# EAGLE board CT_schematic (EAGLE 7.6.0)

Size 100 x 80 mm. Coordinates in mm from the lower left corner, seen from the top.
Outline: 0,0 100,0 100,80 0,80 0,0
Copper layers (1*16): Top 0.035mm / dielectric 1.5mm / Bottom 0.035mm
Design rules "default": minimum track width 10mil, minimum drill 24mil, track to track 8mil, track to pad 8mil, pad to pad 8mil, via to via 8mil, smd to smd 8mil, copper to edge 40mil, drill to drill 8mil, minimum pad ring 10mil, minimum via ring 8mil, stop-mask expansion 4mil, vias tented up to drill 0mil, thermal gap 10mil

## Footprints (pad centres in the part's own frame; a part is rotated, then mirrored left to right if it is on the bottom)
C0603 = smd 0.8 x 0.8: 1 -0.762,0; 2 0.762,0
C0402 = smd 0.5 x 0.5: 1 -0.508,0; 2 0.508,0
C1210 = smd 1.2 x 2.5: 1 -1.524,0; 2 1.524,0
C0805 = smd 1.2 x 1.3: 1 -1.016,0; 2 1.016,0
2220 = smd 1.85 x 5.5: 1 -2.55,0; 2 2.55,0
R0603 = smd 0.8 x 0.8: 1 -0.762,0; 2 0.762,0
EXV-9H = smd 3.505 x 1.676: 1 -2.857,0; 2 2.857,0
L0603 = smd 0.8 x 0.8: 1 -0.762,0; 2 0.762,0
DR1040 = smd 1.6 x 3.2: 1 -4.458,0; 2 4.458,0
PJ-037B_PACKAGE = drill 3.7 square: 1 12,0 | drill 3.2 square: 2 6,0
LQFP144 = smd 0.35 x 1.35: 1 -8.75,-10.625; 2 -8.25,-10.625; 3 -7.75,-10.625; 4 -7.25,-10.625; 5 -6.75,-10.625; 6 -6.25,-10.625; 7 -5.75,-10.625; 8 -5.25,-10.625; 9 -4.75,-10.625; 10 -4.25,-10.625; 11 -3.75,-10.625; 12 -3.25,-10.625; 13 -2.75,-10.62; 14 -2.25,-10.625; 15 -1.75,-10.625; 16 -1.25,-10.625; 17 -0.75,-10.625; 18 -0.25,-10.625; 19 0.25,-10.625; 20 0.75,-10.625; 21 1.25,-10.625; 22 1.75,-10.625; 23 2.25,-10.625; 24 2.75,-10.62; 25 3.25,-10.625; 26 3.75,-10.625; 27 4.25,-10.625; 28 4.75,-10.625; 29 5.25,-10.625; 30 5.75,-10.625; 31 6.25,-10.625; 32 6.75,-10.625; 33 7.25,-10.625; 34 7.75,-10.625; 35 8.25,-10.625; 36 8.75,-10.625; 73 8.75,10.625; 74 8.25,10.625; 75 7.75,10.625; 76 7.25,10.625; 77 6.75,10.625; 78 6.25,10.625; 79 5.75,10.625; 80 5.25,10.625; 81 4.75,10.625; 82 4.25,10.625; 83 3.75,10.625; 84 3.25,10.625; 85 2.75,10.625; 86 2.25,10.625; 87 1.75,10.625; 88 1.25,10.625; 89 0.75,10.625; 90 0.25,10.625; 91 -0.25,10.625; 92 -0.75,10.625; 93 -1.25,10.625; 94 -1.75,10.625; 95 -2.25,10.625; 96 -2.75,10.625; 97 -3.25,10.625; 98 -3.75,10.625; 99 -4.25,10.625; 100 -4.75,10.625; 101 -5.25,10.625; 102 -5.75,10.625; 103 -6.25,10.625; 104 -6.75,10.625; 105 -7.25,10.625; 106 -7.75,10.625; 107 -8.25,10.625; 108 -8.75,10.625 | smd 1.35 x 0.35: 37 10.625,-8.75; 38 10.625,-8.25; 39 10.625,-7.75; 40 10.625,-7.25; 41 10.625,-6.75; 42 10.625,-6.25; 43 10.625,-5.75; 44 10.625,-5.25; 45 10.625,-4.75; 46 10.625,-4.25; 47 10.625,-3.75; 48 10.625,-3.25; 49 10.625,-2.75; 50 10.625,-2.25; 51 10.625,-1.75; 52 10.625,-1.25; 53 10.625,-0.75; 54 10.625,-0.25; 55 10.625,0.25; 56 10.625,0.75; 57 10.625,1.25; 58 10.625,1.75; 59 10.625,2.25; 60 10.625,2.75; 61 10.625,3.25; 62 10.625,3.75; 63 10.625,4.25; 64 10.625,4.75; 65 10.625,5.25; 66 10.625,5.75; 67 10.625,6.25; 68 10.625,6.75; 69 10.625,7.25; 70 10.625,7.75; 71 10.625,8.25; 72 10.625,8.75; 109 -10.625,8.75; 110 -10.625,8.25; 111 -10.625,7.75; 112 -10.625,7.25; 113 -10.625,6.75; 114 -10.625,6.25; 115 -10.625,5.75; 116 -10.625,5.25; 117 -10.625,4.75; 118 -10.625,4.25; 119 -10.625,3.75; 120 -10.625,3.25; 121 -10.625,2.75; 122 -10.625,2.25; 123 -10.625,1.75; 124 -10.625,1.25; 125 -10.625,0.75; 126 -10.625,0.25; 127 -10.625,-0.25; 128 -10.625,-0.75; 129 -10.625,-1.25; 130 -10.625,-1.75; 131 -10.625,-2.25; 132 -10.625,-2.75; 133 -10.625,-3.25; 134 -10.625,-3.75; 135 -10.625,-4.25; 136 -10.625,-4.75; 137 -10.625,-5.25; 138 -10.625,-5.75; 139 -10.625,-6.25; 140 -10.625,-6.75; 141 -10.625,-7.25; 142 -10.625,-7.75; 143 -10.625,-8.25; 144 -10.625,-8.75
SOIC-8 = smd 1.6 x 0.6: 1 -2.7,1.905 | smd 1.55 x 0.6: 2 -2.7,0.635; 3 -2.7,-0.635; 4 -2.7,-1.905; 5 2.7,-1.905; 6 2.7,-0.635; 7 2.7,0.635; 8 2.7,1.905
88E3015A2NNP1C000 = smd 0.3 x 0.55: 1 0,0; 2 0.5,0; 3 1,0; 4 1.5,0; 5 2,0; 6 2.5,0; 7 3,0; 8 3.5,0; 9 4,0; 10 4.5,0; 11 5,0; 12 5.5,0; 13 6,0; 14 6.5,0; 29 6.5,7.5; 30 6,7.5; 31 5.5,7.5; 32 5,7.5; 33 4.5,7.5; 34 4,7.5; 35 3.5,7.5; 36 3,7.5; 37 2.5,7.5; 38 2,7.5; 39 1.5,7.5; 40 1,7.5; 41 0.5,7.5; 42 0,7.5 | smd 0.55 x 0.3: 15 7,0.5; 16 7,1; 17 7,1.5; 18 7,2; 19 7,2.5; 20 7,3; 21 7,3.5; 22 7,4; 23 7,4.5; 24 7,5; 25 7,5.5; 26 7,6; 27 7,6.5; 28 7,7; 43 -0.5,7; 44 -0.5,6.5; 45 -0.5,6; 46 -0.5,5.5; 47 -0.5,5; 48 -0.5,4.5; 49 -0.5,4; 50 -0.5,3.5; 51 -0.5,3; 52 -0.5,2.5; 53 -0.5,2; 54 -0.5,1.5; 55 -0.5,1; 56 -0.5,0.5 | smd 4.4 x 4.4: 57 3.25,3.75
7498011122R = smd 0.71 x 2.29: 1 -3.545,-3.18; 2 -2.525,-3.18; 3 -1.505,-3.18; 4 -0.485,-3.18; 5 0.535,-3.18; 6 1.555,-3.18; 8 3.595,-3.18; 9 5.635,-3.18; 10 6.655,-3.18; 11 -6.605,-3.18; 12 -5.585,-3.18 | smd 1.4 x 2.54: 13 -8.51,10.2; 14 8.51,10.2 | hole 1.4: -3.5,0; 3.5,0
PC28F512P33BFD = smd 0.45 x 0.45: A1 0,0; A2 1,0; A3 2,0; A4 3,0; A5 4,0; A6 5,0; A7 6,0; A8 7,0; B1 0,-1; B2 1,-1; B3 2,-1; B4 3,-1; B5 4,-1; B6 5,-1; B7 6,-1; B8 7,-1; C1 0,-2; C2 1,-2; C3 2,-2; C4 3,-2; C5 4,-2; C6 5,-2; C7 6,-2; C8 7,-2; D1 0,-3; D2 1,-3; D3 2,-3; D4 3,-3; D5 4,-3; D6 5,-3; D7 6,-3; D8 7,-3; E1 0,-4; E2 1,-4; E3 2,-4; E4 3,-4; E5 4,-4; E6 5,-4; E7 6,-4; E8 7,-4; F1 0,-5; F2 1,-5; F3 2,-5; F4 3,-5; F5 4,-5; F6 5,-5; F7 6,-5; F8 7,-5; G1 0,-6; G2 1,-6; G3 2,-6; G4 3,-6; G5 4,-6; G6 5,-6; G7 6,-6; G8 7,-6; H1 0,-7; H2 1,-7; H3 2,-7; H4 3,-7; H5 4,-7; H6 5,-7; H7 6,-7; H8 7,-7
QFN-32 = smd 0.6 x 0.3: 1 -2.3,1.75; 2 -2.3,1.25; 3 -2.3,0.75; 4 -2.3,0.25; 5 -2.3,-0.25; 6 -2.3,-0.75; 7 -2.3,-1.25; 8 -2.3,-1.75; 17 2.3,-1.75; 18 2.3,-1.25; 19 2.3,-0.75; 20 2.3,-0.25; 21 2.3,0.25; 22 2.3,0.75; 23 2.3,1.25; 24 2.3,1.75 | smd 0.3 x 0.6: 9 -1.75,-2.3; 10 -1.25,-2.3; 11 -0.75,-2.3; 12 -0.25,-2.3; 13 0.25,-2.3; 14 0.75,-2.3; 15 1.25,-2.3; 16 1.75,-2.3; 25 1.75,2.3; 26 1.25,2.3; 27 0.75,2.3; 28 0.25,2.3; 29 -0.25,2.3; 30 -0.75,2.3; 31 -1.25,2.3; 32 -1.75,2.3 | smd 3.2 x 3.2: EXP 0,0
SJ-43515TS-SMT-TR = smd 2.2 x 3: 1 0.6,-7.4; 4 3.4,-7.4 | smd 3 x 3: 2 12.8,-7.4; 5 17,-3 | smd 2 x 3: 3 5.3,0; 6 2.5,0 | drill 1.8: P$7 4.5,-3.69; P$8 11.54,-3.69
WM-64PC = drill 0.6 pad 1: 1 -1,0.95; 2 -1,-0.95
QFN-28 = smd 0.813 x 0.305: 1 -2.451,1.5; 2 -2.451,1; 3 -2.451,0.5; 4 -2.451,0; 5 -2.451,-0.5; 6 -2.451,-1; 7 -2.451,-1.5; 15 2.451,-1.5; 16 2.451,-1; 17 2.451,-0.5; 18 2.451,0; 19 2.451,0.5; 20 2.451,1; 21 2.451,1.5 | smd 0.305 x 0.813: 8 -1.5,-2.451; 9 -1,-2.451; 10 -0.5,-2.451; 11 0,-2.451; 12 0.5,-2.451; 13 1,-2.451; 14 1.5,-2.451; 22 1.5,2.451; 23 1,2.451; 24 0.5,2.451; 25 0,2.451; 26 -0.5,2.451; 27 -1,2.451; 28 -1.5,2.451 | smd 3.607 x 3.607: 29 0,0
ABS07-32.768KHZ-7-T = smd 1.1 x 2.4: 1 -2.5,0; 2 0,0
ABLS-25.000MHZ-B2F-T = smd 5.6 x 2.8: 1 -3.81,0; 2 5.69,0
ABLS-12.288MHZ-B4-T = smd 5.6 x 2.8: 1 -3.81,0; 2 5.69,0
ASFL1 = smd 1.7 x 1.5: 1 -1.27,-1.1; 2 1.27,-1.1; 3 1.27,1.1; 4 -1.27,1.1
WSON-8 = smd 0.3 x 0.6: 1 -0.75,0; 2 0.05,0; 3 0.85,0; 4 1.65,0; 5 1.65,3.8; 6 0.85,3.8; 7 0.05,3.8; 8 -0.75,3.8 | smd 3 x 2.6: PAD 0.45,1.9
QFN-16_EP = smd 0.805 x 0.3: 1 -1.452,0.75; 2 -1.452,0.25; 3 -1.452,-0.25; 4 -1.452,-0.75; 9 1.452,-0.75; 10 1.452,-0.25; 11 1.452,0.25; 12 1.452,0.75 | smd 0.3 x 0.805: 5 -0.75,-1.452; 6 -0.25,-1.452; 7 0.25,-1.452; 8 0.75,-1.452; 13 0.75,1.452; 14 0.25,1.452; 15 -0.25,1.452; 16 -0.75,1.452 | smd 1.55 x 1.55: 17 0,0
SON-6 = smd 0.55 x 0.3: 1 -0.355,0.5 | smd 0.52 x 0.3: 2 -0.37,0; 3 -0.37,-0.5; 4 0.37,-0.5; 5 0.37,0; 6 0.37,0.5
SW_4-1437565-2 = smd 1.4 x 2.1: 1 -2.23,4.55; 2 -2.23,-4.55; 3 2.23,4.55; 4 2.23,-4.55
LGM67K-G1J2-24-Z = smd 0.8 x 1.4: A -2,0; C 0,0
NC7SZ125M5X = smd 1.3 x 0.7: 1 -1.3,0.95; 2 -1.3,0; 3 -1.3,-0.95; 4 1.3,-0.95; 5 1.3,0.95

## Placement (x,y rotation side)
C1  1e-06  [C0603]  -66.04,100.33 0 top  (outside the outline)
C2  1e-07  [C0603]  -69.85,100.33 0 top  (outside the outline)
C3  1e-07  [C0603]  -73.66,100.33 0 top  (outside the outline)
C4  1e-07  [C0603]  -77.47,100.33 0 top  (outside the outline)
C5  1e-07  [C0603]  -81.28,100.33 0 top  (outside the outline)
C6  1e-07  [C0603]  -85.09,100.33 0 top  (outside the outline)
C7  1e-07  [C0603]  -88.9,100.33 0 top  (outside the outline)
C8  1e-07  [C0603]  -92.71,100.33 0 top  (outside the outline)
C9  1e-07  [C0603]  -96.52,100.33 0 top  (outside the outline)
C10  1e-07  [C0603]  -100.33,100.33 0 top  (outside the outline)
C11  1e-07  [C0603]  -104.14,100.33 0 top  (outside the outline)
C12  1e-07  [C0603]  -15.24,105.41 0 top  (outside the outline)
C13  1e-07  [C0603]  -19.05,105.41 0 top  (outside the outline)
C14  4.7e-06  [C0603]  -54.61,100.33 0 top  (outside the outline)
C15  2.2e-06  [C0603]  -58.42,100.33 0 top  (outside the outline)
C16  2.2e-06  [C0603]  -62.23,100.33 0 top  (outside the outline)
C17  1e-08  [C0603]  -22.86,105.41 0 top  (outside the outline)
C18  1e-06  [C0603]  -26.67,105.41 0 top  (outside the outline)
C19  1e-11  [C0402]  -87.63,110.49 0 top  (outside the outline)
C20  1e-11  [C0402]  -91.44,110.49 0 top  (outside the outline)
C21  1e-08  [C0402]  -95.25,110.49 0 top  (outside the outline)
C22  2.2e-08  [C0402]  -68.58,110.49 0 top  (outside the outline)
C23  1e-07  [C0603]  -30.48,105.41 0 top  (outside the outline)
C24  1e-07  [C0603]  -34.29,105.41 0 top  (outside the outline)
C25  1e-07  [C0603]  -38.1,105.41 0 top  (outside the outline)
C26  1e-07  [C0603]  -41.91,105.41 0 top  (outside the outline)
C27  1e-07  [C0603]  -45.72,105.41 0 top  (outside the outline)
C28  1e-07  [C0603]  -49.53,105.41 0 top  (outside the outline)
C29  2.2e-11  [C0402]  -72.39,110.49 0 top  (outside the outline)
C30  2.2e-11  [C0402]  -76.2,110.49 0 top  (outside the outline)
C31  1e-07  [C0402]  -99.06,110.49 0 top  (outside the outline)
C32  1e-08  [C0402]  -102.87,110.49 0 top  (outside the outline)
C33  1e-07  [C0402]  -15.24,115.57 0 top  (outside the outline)
C34  1e-08  [C0402]  -19.05,115.57 0 top  (outside the outline)
C35  1e-07  [C0402]  -22.86,115.57 0 top  (outside the outline)
C36  1e-08  [C0402]  -26.67,115.57 0 top  (outside the outline)
C37  1e-06  [C0603]  -53.34,105.41 0 top  (outside the outline)
C38  1e-06  [C0603]  -57.15,105.41 0 top  (outside the outline)
C39  1e-06  [C0603]  -60.96,105.41 0 top  (outside the outline)
C40  1e-06  [C0603]  -64.77,105.41 0 top  (outside the outline)
C41  1e-06  [C0603]  -68.58,105.41 0 top  (outside the outline)
C42  1e-06  [C0603]  -72.39,105.41 0 top  (outside the outline)
C43  1e-06  [C0603]  -76.2,105.41 0 top  (outside the outline)
C44  1e-07  [C0402]  -30.48,115.57 0 top  (outside the outline)
C45  1e-07  [C0402]  -34.29,115.57 0 top  (outside the outline)
C46  1e-07  [C0402]  -38.1,115.57 0 top  (outside the outline)
C47  1e-07  [C0402]  -41.91,115.57 0 top  (outside the outline)
C48  1e-06  [C0603]  -80.01,105.41 0 top  (outside the outline)
C49  2.2e-05  [C1210]  -16.51,90.17 0 top  (outside the outline)
C50  2.2e-05  [C1210]  -22.86,90.17 0 top  (outside the outline)
C51  1e-09  [C0402]  -45.72,115.57 0 top  (outside the outline)
C52  1e-09  [C0402]  -49.53,115.57 0 top  (outside the outline)
C53  1e-07  [C0402]  -53.34,115.57 0 top  (outside the outline)
C54  1e-07  [C0402]  -57.15,115.57 0 top  (outside the outline)
C55  1e-07  [C0402]  -60.96,115.57 0 top  (outside the outline)
C56  1e-07  [C0402]  -64.77,115.57 0 top  (outside the outline)
C57  1e-07  [C0402]  -68.58,115.57 0 top  (outside the outline)
C58  1e-05  [C0805]  -53.34,88.9 0 top  (outside the outline)
C59  1e-05  [C0805]  -58.42,88.9 0 top  (outside the outline)
C60  1e-05  [C0805]  -63.5,88.9 0 top  (outside the outline)
C61  1e-05  [C0805]  -68.58,88.9 0 top  (outside the outline)
C62  1e-05  [C0805]  -73.66,88.9 0 top  (outside the outline)
C63  2.2e-11  [C0402]  -80.01,110.49 0 top  (outside the outline)
C64  2.2e-11  [C0402]  -83.82,110.49 0 top  (outside the outline)
C65  1e-08  [C0402]  -72.39,115.57 0 top  (outside the outline)
C66  1e-08  [C0402]  -76.2,115.57 0 top  (outside the outline)
C67  1e-08  [C0402]  -80.01,115.57 0 top  (outside the outline)
C68  1e-05  [C1210]  -29.21,90.17 0 top  (outside the outline)
C69  1e-05  [C0805]  -78.74,88.9 0 top  (outside the outline)
C70  1e-05  [C0805]  -83.82,88.9 0 top  (outside the outline)
C71  1e-06  [C0603]  -83.82,105.41 0 top  (outside the outline)
C72  1e-07  [C0402]  -83.82,115.57 0 top  (outside the outline)
C73  6.8e-05  [2220]  -88.9,62.23 0 top  (outside the outline)
C74  8e-07  [R0603]  -87.63,105.41 0 top  (outside the outline)
C75  1e-05  [C1210]  -35.56,90.17 0 top  (outside the outline)
C76  1e-07  [C0402]  -87.63,115.57 0 top  (outside the outline)
C77  0.0001  [EXV-9H]  -91.44,73.66 0 top  (outside the outline)
C78  0.0001  [EXV-9H]  -17.78,82.55 0 top  (outside the outline)
C79  1e-08  [C0402]  -91.44,115.57 0 top  (outside the outline)
C80  1e-08  [C0402]  -95.25,115.57 0 top  (outside the outline)
F1  240.0  [L0603]  -91.44,105.41 0 top  (outside the outline)
I1  5.2e-06  [DR1040]  -38.1,62.23 0 top  (outside the outline)
J1  PJ-037B  [PJ-037B_PACKAGE]  -55.88,49.53 0 top  (outside the outline)
R2  1000.0  [R0603]  -95.25,105.41 0 top  (outside the outline)
R4  4700.0  [R0603]  -99.06,105.41 0 top  (outside the outline)
R5  4700.0  [R0603]  -102.87,105.41 0 top  (outside the outline)
R6  2200.0  [R0603]  -15.24,110.49 0 top  (outside the outline)
R7  2200.0  [R0603]  -19.05,110.49 0 top  (outside the outline)
R8  10000.0  [R0603]  -30.48,95.25 0 top  (outside the outline)
R9  10000.0  [R0603]  -35.56,95.25 0 top  (outside the outline)
R10  10000.0  [R0603]  -40.64,95.25 0 top  (outside the outline)
R11  10000.0  [R0603]  -45.72,95.25 0 top  (outside the outline)
R12  10000.0  [R0603]  -50.8,95.25 0 top  (outside the outline)
R13  10000.0  [R0603]  -55.88,95.25 0 top  (outside the outline)
R14  0.1  [R0603]  -22.86,110.49 0 top  (outside the outline)
R15  0.1  [R0603]  -26.67,110.49 0 top  (outside the outline)
R16  200.0  [R0603]  -30.48,110.49 0 top  (outside the outline)
R17  200.0  [R0603]  -34.29,110.49 0 top  (outside the outline)
R18  10000.0  [R0603]  -60.96,95.25 0 top  (outside the outline)
R19  10000.0  [R0603]  -66.04,95.25 0 top  (outside the outline)
R20  10000.0  [R0603]  -71.12,95.25 0 top  (outside the outline)
R21  2000.0  [R0603]  -38.1,110.49 0 top  (outside the outline)
R22  10000.0  [R0603]  -76.2,95.25 0 top  (outside the outline)
R23  10000.0  [R0603]  -81.28,95.25 0 top  (outside the outline)
R24  10000.0  [R0603]  -86.36,95.25 0 top  (outside the outline)
R25  10000.0  [R0603]  -91.44,95.25 0 top  (outside the outline)
R26  10000.0  [R0603]  -96.52,95.25 0 top  (outside the outline)
R27  10000.0  [R0603]  -101.6,95.25 0 top  (outside the outline)
R28  1270.0  [R0603]  -41.91,110.49 0 top  (outside the outline)
R29  1270.0  [R0603]  -45.72,110.49 0 top  (outside the outline)
R30  47000.0  [R0603]  -15.24,100.33 0 top  (outside the outline)
R31  47000.0  [R0603]  -20.32,100.33 0 top  (outside the outline)
R32  47000.0  [R0603]  -25.4,100.33 0 top  (outside the outline)
R33  680.0  [R0603]  -49.53,110.49 0 top  (outside the outline)
R34  100000.0  [R0603]  -93.98,88.9 0 top  (outside the outline)
R35  200.0  [R0603]  -53.34,110.49 0 top  (outside the outline)
R36  1000.0  [R0603]  -57.15,110.49 0 top  (outside the outline)
R37  20000.0  [R0603]  -30.48,100.33 0 top  (outside the outline)
R38  62000.0  [R0603]  -35.56,100.33 0 top  (outside the outline)
R39  300000.0  [R0603]  -99.06,88.9 0 top  (outside the outline)
R40  100000.0  [R0603]  -104.14,88.9 0 top  (outside the outline)
R41  153694.38  [R0603]  -88.9,88.9 0 top  (outside the outline)
R42  100000.0  [R0603]  -15.24,95.25 0 top  (outside the outline)
R43  10000.0  [R0603]  -40.64,100.33 0 top  (outside the outline)
R44  10000.0  [R0603]  -45.72,100.33 0 top  (outside the outline)
R45  18000.0  [R0603]  -50.8,100.33 0 top  (outside the outline)
R46  470000.0  [R0603]  -20.32,95.25 0 top  (outside the outline)
R47  120000.0  [R0603]  -25.4,95.25 0 top  (outside the outline)
U1  STM32F427ZGT6  [LQFP144]  -44.45,11.43 0 top  (outside the outline)
U2  AT25512N-SH-T  [SOIC-8]  -80.01,62.23 0 top  (outside the outline)
U3  88E3015A2NNP1C000  [88E3015A2NNP1C000]  -74.93,45.72 0 top  (outside the outline)
U4  7498011122R  [7498011122R]  -22.86,7.62 0 top  (outside the outline)
U5  PC28F512P33BFD  [PC28F512P33BFD]  -91.44,53.34 0 top  (outside the outline)
U6  SGTL5000XNAA3  [QFN-32]  -64.77,62.23 0 top  (outside the outline)
U7  SJ-43515TS-SMT-TR  [SJ-43515TS-SMT-TR]  -82.55,10.16 0 top  (outside the outline)
U8  SJ-43515TS-SMT-TR  [SJ-43515TS-SMT-TR]  -39.37,38.1 0 top  (outside the outline)
U9  SJ-43515TS-SMT-TR  [SJ-43515TS-SMT-TR]  -67.31,38.1 0 top  (outside the outline)
U10  WM-64PCT  [WM-64PC]  -50.8,62.23 0 top  (outside the outline)
U11  WM8731CLSEFL  [QFN-28]  -101.6,82.55 0 top  (outside the outline)
U12  SJ-43515TS-SMT-TR  [SJ-43515TS-SMT-TR]  -95.25,38.1 0 top  (outside the outline)
U13  SJ-43515TS-SMT-TR  [SJ-43515TS-SMT-TR]  -39.37,52.07 0 top  (outside the outline)
U14  ABS07-32.768KHZ-7-T  [ABS07-32.768KHZ-7-T]  -80.01,82.55 0 top  (outside the outline)
U15  ABLS-25.000MHZ-B2F-T  [ABLS-25.000MHZ-B2F-T]  -36.83,82.55 0 top  (outside the outline)
U16  ABLS-12.288MHZ-B4-T  [ABLS-12.288MHZ-B4-T]  -57.15,82.55 0 top  (outside the outline)
U17  ASFL-24.57MHZ-NCS  [ASFL1]  -66.04,73.66 0 top  (outside the outline)
U18  ASFL1-25MHZ-NCS  [ASFL1]  -82.55,73.66 0 top  (outside the outline)
U19  LP3878SDX-ADJ/NOPB  [WSON-8]  -30.48,72.39 0 top  (outside the outline)
U20  LTC3601EUD#PBF  [QFN-16_EP]  -62.23,110.49 0 top  (outside the outline)
U21  LP2951ACSDX/NOPB  [WSON-8]  -48.26,72.39 0 top  (outside the outline)
U22  TPS3895ADRYR  [SON-6]  -97.79,114.3 0 top  (outside the outline)
U23  4-1437565-2  [SW_4-1437565-2]  -27.94,63.5 0 top  (outside the outline)
U24  Q65110A2395  [LGM67K-G1J2-24-Z]  -88.9,82.55 0 top  (outside the outline)
U25  nc7sz125m5x  [NC7SZ125M5X]  -40.64,88.9 0 top  (outside the outline)
U26  nc7sz125m5x  [NC7SZ125M5X]  -46.99,88.9 0 top  (outside the outline)

## Library data of the parts
C1-C80 F1 I1 J1 R2 R4-R47 U1-U26 = circuit_tree

## Nets
CLK_CRYSTAL_U1_8: C19.1 U1.8 U14.1
CLK_CRYSTAL_U1_9: C20.1 U1.9 U14.2
CLK_CRYSTAL_U3_32: C29.1 U3.32 U15.1
CLK_CRYSTAL_U3_33: C30.1 U3.33 U15.2
CLK_CRYSTAL_U11_1: C63.1 U11.1 U16.1
CLK_CRYSTAL_U11_2: C64.1 U11.2 U16.2
CLK_U1_23: U1.23 U18.3
CLK_U6_21: U6.21 U17.3
GND: C1.2 C2.2 C3.2 C4.2 C5.2 C6.2 C7.2 C8.2 C9.2 C10.2 C11.2 C12.2 C13.2 C14.2 C15.2 C16.2 C17.2 C18.2 C19.2 C20.2 C21.2 C22.2 C23.2 C24.2 C25.2 C26.2 C27.2 C28.2 C29.2 C30.2 C31.2 C32.2 C33.2 C34.2 C35.2 C36.2 C44.2 C45.2 C46.2 C47.2 C48.2 C52.2 C53.2 C54.2 C55.2 C56.2 C57.2 C58.2 C59.2 C60.2 C61.2 C62.2 C63.2 C64.2 C65.2 C66.2 C67.2 C68.2 C69.2 C70.2 C71.2 C73.1 C73.2 C74.2 C75.2 C76.2 C77.2 C78.2 C79.2 C80.2 J1.2 R2.2 R14.2 R15.2 R21.2 R29.2 R30.2 R31.2 R32.2 R36.2 R37.2 R39.2 R42.2 R45.2 R47.2 U1.16 U1.31 U1.38 U1.51 U1.61 U1.83 U1.94 U1.107 U1.120 U1.130 U2.4 U3.1 U3.2 U3.57 U4.10 U4.12 U5.B2 U5.H2 U5.H4 U5.H6 U6.1 U6.3 U6.7 U6.EXP U8.1 U9.1 U10.2 U11.4 U11.15 U11.19 U11.25 U11.26 U11.29 U12.1 U13.1 U17.2 U18.2 U19.3 U19.PAD U20.1 U20.9 U20.17 U21.3 U21.4 U21.PAD U22.2 U24.C U25.1 U25.3 U26.1 U26.3
NET_U1_25: R5.1 U1.25 U26.4
NET_U1_27: R6.1 U1.27 U3.38
NET_U1_33: C17.1 C18.1 F1.1 U1.32 U1.33
NET_U1_36: R7.1 U1.36 U3.35
NET_U1_48: R10.1 U1.48
NET_U1_71: C15.1 U1.71
NET_U1_106: C16.1 U1.106
NET_U1_138: R9.1 U1.138
NET_U1_141: U24.A
NET_U1_142: U23.3 U23.4
NET_U1_143: R8.1 U1.143
NET_U2_3: R11.1 U2.3
NET_U2_7: R13.1 U2.7
NET_U3_9: R19.1 U3.9
NET_U3_10: R22.1 U3.10
NET_U3_16: R18.1 U3.16
NET_U3_19: U3.19
NET_U3_28: R21.1 U3.28
NET_U3_39: R20.1 U3.39
NET_U3_44: U3.44 U3.48 U3.49 U3.56
NET_U4_1: U3.26 U4.1
NET_U4_3: U3.25 U4.3
NET_U4_4: U3.23 U4.4
NET_U4_5: C22.1 U4.2 U4.5
NET_U4_6: U3.22 U4.6
NET_U4_7: R16.2
NET_U4_8: R15.1 R17.2 U4.8
NET_U4_9: R16.1 U4.9
NET_U4_11: R17.1 U4.11
NET_U4_13: R14.1 U4.13 U4.14
NET_U5_A4: C35.1 C36.1 U5.A4
NET_U5_C6: R26.1 U5.C6
NET_U5_D4: R4.1 U5.D4 U25.4
NET_U6_10: C47.1 U6.10
NET_U6_29: R28.1 U6.29
NET_U6_31: R29.1 U6.31
NET_U7_1: U6.4 U7.1
NET_U7_2: U6.2 U7.2
NET_U7_5: U6.6 U7.5
NET_U8_2: C38.1 U8.2
NET_U8_5: C37.1 U8.5
NET_U8_11: C38.2
NET_U8_12: C37.2
NET_U9_2: C40.1 C41.1 U9.2
NET_U9_5: C39.1 U9.5
NET_U9_13: C40.2 C41.2
NET_U9_14: C39.2
NET_U10_1: C42.1 C43.1 C48.1 U6.16 U10.1
NET_U10_15: C42.2 C43.2
NET_U11_9: U11.9
NET_U11_20: C57.1 C62.1 U11.20
NET_U12_2: C50.1 R31.1 U12.2
NET_U12_5: C49.1 R30.1 U12.5
NET_U12_13: C49.2
NET_U12_14: C50.2
NET_U13_5: C51.1 C52.1 R32.1 R33.1 U13.5
NET_U13_21: R33.2
NET_U13_22: C51.2
NET_U19_1: C67.1 U19.1
NET_U19_6: R35.2 R36.1 U19.6
NET_U19_8: R34.1 U19.8
NET_U20_3: C72.2 I1.1 U20.3 U20.4
NET_U20_6: C72.1 U20.6
NET_U20_7: C71.1 U20.7 U20.12
NET_U20_10: R39.1 U20.10
NET_U20_11: R37.1 R38.1 U20.11
NET_U20_14: U20.14
NET_U20_ATNET_3: I1.2 R38.2
NET_U21_5: R40.1 U21.5
NET_U21_7: R41.2 R42.1 U21.7
NET_U22_1: R44.1 R45.1 U22.1
NET_U22_3: R46.2 R47.1 U22.3
NET_U22_4: R43.1 U22.4 U25.2 U26.2
NET_U23_1: R2.1 U23.1 U23.2
PROC_ETH_COL: U1.37 U3.3 U3.19
PROC_ETH_CRS: U1.34 U3.18
PROC_ETH_RX_CLK: U1.35 U3.45
PROC_ETH_RX_DV: U1.43 U3.41
PROC_ETH_RX_ER: U1.69 U3.17
PROC_ETH_RXD0: U1.44 U3.42
PROC_ETH_RXD1: U1.45 U3.43
PROC_ETH_RXD2: U1.46 U3.46
PROC_ETH_RXD3: U1.47 U3.47
PROC_ETH_TX_CLK: U1.29 U3.52
PROC_ETH_TX_EN: U1.70 U3.55
PROC_ETH_TXD0: U1.73 U3.50
PROC_ETH_TXD1: U1.129 U3.51
PROC_ETH_TXD2: U1.28 U3.53
PROC_ETH_TXD3: U1.139 U3.54
PROC_FMC_A0: U1.10 U5.A1
PROC_FMC_A1: U1.11 U5.B1
PROC_FMC_A2: U1.12 U5.C1
PROC_FMC_A3: U1.13 U5.D1
PROC_FMC_A4: U1.14 U5.D2
PROC_FMC_A5: U1.15 U5.A2
PROC_FMC_A6: U1.50 U5.C2
PROC_FMC_A7: U1.53 U5.A3
PROC_FMC_A8: U1.54 U5.B3
PROC_FMC_A9: U1.55 U5.C3
PROC_FMC_A10: U1.56 U5.D3
PROC_FMC_A11: U1.57 U5.C4
PROC_FMC_A12: U1.87 U5.A5
PROC_FMC_A13: U1.88 U5.B5
PROC_FMC_A14: U1.89 U5.C5
PROC_FMC_A15: U1.90 U5.D7
PROC_FMC_A16: U1.80 U5.D8
PROC_FMC_A17: U1.81 U5.A7
PROC_FMC_A18: U1.82 U5.B7
PROC_FMC_A19: U1.2 U5.C7
PROC_FMC_A20: U1.3 U5.C8
PROC_FMC_A21: U1.4 U5.A8
PROC_FMC_A22: U1.5 U5.G1
PROC_FMC_A23: U1.1 U5.H8
PROC_FMC_A24: U1.128 U5.B6
PROC_FMC_CLK: U1.117 U5.E6
PROC_FMC_D0: U1.85 U5.F2
PROC_FMC_D1: U1.86 U5.E2
PROC_FMC_D2: U1.114 U5.G3
PROC_FMC_D3: U1.115 U5.E4
PROC_FMC_D4: U1.58 U5.E5
PROC_FMC_D5: U1.59 U5.G5
PROC_FMC_D6: U1.60 U5.G6
PROC_FMC_D7: U1.63 U5.H7
PROC_FMC_D8: U1.64 U5.E1
PROC_FMC_D9: U1.65 U5.E3
PROC_FMC_D10: U1.66 U5.F3
PROC_FMC_D11: U1.67 U5.F4
PROC_FMC_D12: U1.68 U5.F5
PROC_FMC_D13: U1.77 U5.H5
PROC_FMC_D14: U1.78 U5.G7
PROC_FMC_D15: U1.79 U5.E7
PROC_FMC_NE2: R24.1 U1.124 U5.B4
PROC_FMC_NL: R23.1 U1.137 U5.F6
PROC_FMC_NOE: R25.1 U1.118 U5.F8
PROC_FMC_NWAIT: U1.122 U5.F7
PROC_FMC_NWE: R27.1 U1.119 U5.G8
PROC_I2S2_CK: U1.74 U11.7
PROC_I2S2_EXT_SD: U1.75 U11.10
PROC_I2S2_SD: U1.76 U11.8
PROC_I2S2_WS: U1.140 U11.9 U11.11
PROC_I2S3_CK: U1.111 U6.24
PROC_I2S3_EXT_SD: U1.112 U6.25
PROC_I2S3_SD: U1.113 U6.26
PROC_I2S3_WS: U1.110 U6.23
PROC_SPI1_MISO: U1.42 U2.2
PROC_SPI1_MOSI: U1.135 U2.5
PROC_SPI1_NSS: R12.1 U1.40 U2.1
PROC_SPI1_SCK: U1.41 U2.6
VCC_S1_12V9: C68.1 C70.1 C74.1 C77.1 C78.1 J1.1 R34.2 U19.4 U20.15 U20.16 U21.8
VCC_TIER1_1V2: C23.1 C24.1 C44.1 C69.1 R35.1 U3.4 U3.11 U3.34 U6.30 U19.5
VCC_TIER1_2V5: C1.1 C2.1 C3.1 C4.1 C5.1 C6.1 C7.1 C8.1 C9.1 C10.1 C11.1 C12.1 C13.1 C14.1 C21.1 C25.1 C26.1 C27.1 C28.1 C31.1 C32.1 C33.1 C34.1 C45.1 C46.1 C53.1 C54.1 C55.1 C56.1 C58.1 C59.1 C60.1 C61.1 C73.2 C76.1 C79.1 C80.1 F1.2 I1.2 R4.2 R5.2 R6.2 R7.2 R8.2 R9.2 R10.2 R11.2 R12.2 R13.2 R18.2 R19.2 R20.2 R22.2 R23.2 R24.2 R25.2 R26.2 R27.2 R28.2 R38.2 R43.2 R44.2 R46.1 U1.6 U1.17 U1.30 U1.39 U1.52 U1.62 U1.72 U1.84 U1.95 U1.108 U1.121 U1.131 U1.144 U2.8 U3.6 U3.12 U3.13 U3.20 U3.24 U3.29 U3.36 U4.2 U5.A6 U5.D5 U5.D6 U5.G4 U5.H3 U6.5 U6.20 U11.3 U11.5 U11.12 U11.18 U20.8 U22.6 U25.5 U26.5
VCC_TIER1_3V3: C65.1 C66.1 C75.1 R40.2 R41.1 U17.4 U18.4 U21.1

## Tracks (layer width: path | path; a pad name or v marks a point on that pad's centre or on a via)
CLK_CRYSTAL_U1_8  (2 unrouted)
CLK_CRYSTAL_U1_9  (2 unrouted)
CLK_CRYSTAL_U3_32  (2 unrouted)
CLK_CRYSTAL_U3_33  (2 unrouted)
CLK_CRYSTAL_U11_1  (2 unrouted)
CLK_CRYSTAL_U11_2  (2 unrouted)
CLK_U1_23  (1 unrouted)
CLK_U6_21  (1 unrouted)
GND  (135 unrouted)
NET_U1_25  (2 unrouted)
NET_U1_27  (2 unrouted)
NET_U1_33  (4 unrouted)
NET_U1_36  (2 unrouted)
NET_U1_48  (1 unrouted)
NET_U1_71  (1 unrouted)
NET_U1_106  (1 unrouted)
NET_U1_138  (1 unrouted)
NET_U1_142  (1 unrouted)
NET_U1_143  (1 unrouted)
NET_U2_3  (1 unrouted)
NET_U2_7  (1 unrouted)
NET_U3_9  (1 unrouted)
NET_U3_10  (1 unrouted)
NET_U3_16  (1 unrouted)
NET_U3_28  (1 unrouted)
NET_U3_39  (1 unrouted)
NET_U3_44  (3 unrouted)
NET_U4_1  (1 unrouted)
NET_U4_3  (1 unrouted)
NET_U4_4  (1 unrouted)
NET_U4_5  (2 unrouted)
NET_U4_6  (1 unrouted)
NET_U4_8  (2 unrouted)
NET_U4_9  (1 unrouted)
NET_U4_11  (1 unrouted)
NET_U4_13  (2 unrouted)
NET_U5_A4  (2 unrouted)
NET_U5_C6  (1 unrouted)
NET_U5_D4  (2 unrouted)
NET_U6_10  (1 unrouted)
NET_U6_29  (1 unrouted)
NET_U6_31  (1 unrouted)
NET_U7_1  (1 unrouted)
NET_U7_2  (1 unrouted)
NET_U7_5  (1 unrouted)
NET_U8_2  (1 unrouted)
NET_U8_5  (1 unrouted)
NET_U9_2  (2 unrouted)
NET_U9_5  (1 unrouted)
NET_U9_13  (1 unrouted)
NET_U10_1  (4 unrouted)
NET_U10_15  (1 unrouted)
NET_U11_20  (2 unrouted)
NET_U12_2  (2 unrouted)
NET_U12_5  (2 unrouted)
NET_U13_5  (4 unrouted)
NET_U19_1  (1 unrouted)
NET_U19_6  (2 unrouted)
NET_U19_8  (1 unrouted)
NET_U20_3  (3 unrouted)
NET_U20_6  (1 unrouted)
NET_U20_7  (2 unrouted)
NET_U20_10  (1 unrouted)
NET_U20_11  (2 unrouted)
NET_U20_ATNET_3  (1 unrouted)
NET_U21_5  (1 unrouted)
NET_U21_7  (2 unrouted)
NET_U22_1  (2 unrouted)
NET_U22_3  (2 unrouted)
NET_U22_4  (3 unrouted)
NET_U23_1  (2 unrouted)
PROC_ETH_COL  (2 unrouted)
PROC_ETH_CRS  (1 unrouted)
PROC_ETH_RX_CLK  (1 unrouted)
PROC_ETH_RX_DV  (1 unrouted)
PROC_ETH_RX_ER  (1 unrouted)
PROC_ETH_RXD0  (1 unrouted)
PROC_ETH_RXD1  (1 unrouted)
PROC_ETH_RXD2  (1 unrouted)
PROC_ETH_RXD3  (1 unrouted)
PROC_ETH_TX_CLK  (1 unrouted)
PROC_ETH_TX_EN  (1 unrouted)
PROC_ETH_TXD0  (1 unrouted)
PROC_ETH_TXD1  (1 unrouted)
PROC_ETH_TXD2  (1 unrouted)
PROC_ETH_TXD3  (1 unrouted)
PROC_FMC_A0  (1 unrouted)
PROC_FMC_A1  (1 unrouted)
PROC_FMC_A2  (1 unrouted)
PROC_FMC_A3  (1 unrouted)
PROC_FMC_A4  (1 unrouted)
PROC_FMC_A5  (1 unrouted)
PROC_FMC_A6  (1 unrouted)
PROC_FMC_A7  (1 unrouted)
PROC_FMC_A8  (1 unrouted)
PROC_FMC_A9  (1 unrouted)
PROC_FMC_A10  (1 unrouted)
PROC_FMC_A11  (1 unrouted)
PROC_FMC_A12  (1 unrouted)
PROC_FMC_A13  (1 unrouted)
PROC_FMC_A14  (1 unrouted)
PROC_FMC_A15  (1 unrouted)
PROC_FMC_A16  (1 unrouted)
PROC_FMC_A17  (1 unrouted)
PROC_FMC_A18  (1 unrouted)
PROC_FMC_A19  (1 unrouted)
PROC_FMC_A20  (1 unrouted)
PROC_FMC_A21  (1 unrouted)
PROC_FMC_A22  (1 unrouted)
PROC_FMC_A23  (1 unrouted)
PROC_FMC_A24  (1 unrouted)
PROC_FMC_CLK  (1 unrouted)
PROC_FMC_D0  (1 unrouted)
PROC_FMC_D1  (1 unrouted)
PROC_FMC_D2  (1 unrouted)
PROC_FMC_D3  (1 unrouted)
PROC_FMC_D4  (1 unrouted)
PROC_FMC_D5  (1 unrouted)
PROC_FMC_D6  (1 unrouted)
PROC_FMC_D7  (1 unrouted)
PROC_FMC_D8  (1 unrouted)
PROC_FMC_D9  (1 unrouted)
PROC_FMC_D10  (1 unrouted)
PROC_FMC_D11  (1 unrouted)
PROC_FMC_D12  (1 unrouted)
PROC_FMC_D13  (1 unrouted)
PROC_FMC_D14  (1 unrouted)
PROC_FMC_D15  (1 unrouted)
PROC_FMC_NE2  (2 unrouted)
PROC_FMC_NL  (2 unrouted)
PROC_FMC_NOE  (2 unrouted)
PROC_FMC_NWAIT  (1 unrouted)
PROC_FMC_NWE  (2 unrouted)
PROC_I2S2_CK  (1 unrouted)
PROC_I2S2_EXT_SD  (1 unrouted)
PROC_I2S2_SD  (1 unrouted)
PROC_I2S2_WS  (2 unrouted)
PROC_I2S3_CK  (1 unrouted)
PROC_I2S3_EXT_SD  (1 unrouted)
PROC_I2S3_SD  (1 unrouted)
PROC_I2S3_WS  (1 unrouted)
PROC_SPI1_MISO  (1 unrouted)
PROC_SPI1_MOSI  (1 unrouted)
PROC_SPI1_NSS  (2 unrouted)
PROC_SPI1_SCK  (1 unrouted)
VCC_S1_12V9  (10 unrouted)
VCC_TIER1_1V2  (9 unrouted)
VCC_TIER1_2V5  (99 unrouted)
VCC_TIER1_3V3  (7 unrouted)